# EAGLE board 05A-010 (EAGLE 9.6.2)
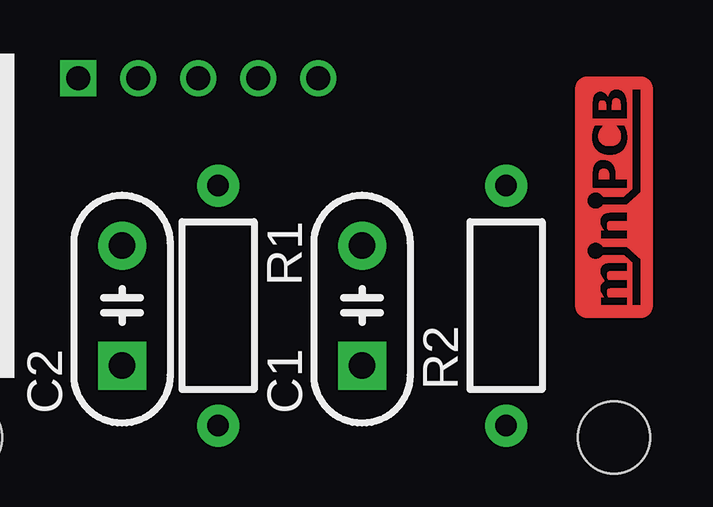
[diagram p0: board, top side]
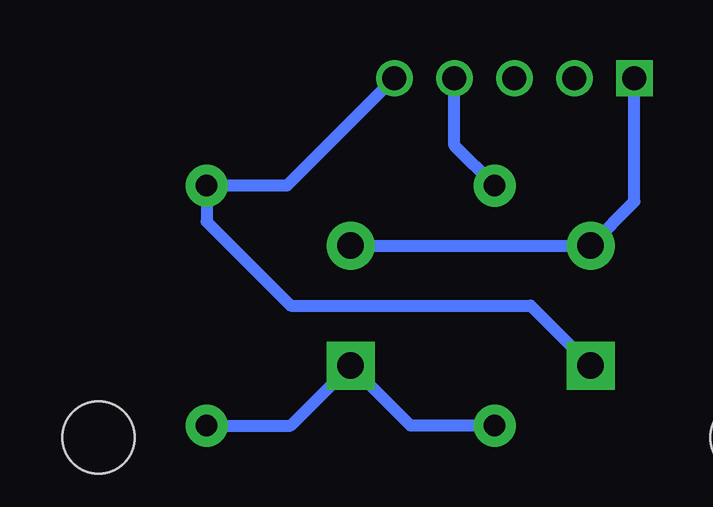
[diagram p1: board, bottom side, seen from below]

No outline drawn. Coordinates in mm, seen from the top.
Copper layers (1*16): Top 0.035mm / dielectric 1.5mm / Bottom 0.035mm
Design rules "default": minimum track width 6mil, minimum drill 0.35mm, track to track 6mil, track to pad 6mil, pad to pad 6mil, via to via 6mil, smd to smd 6mil, copper to edge 40mil, drill to drill 6mil, minimum pad ring 10mil, minimum via ring 8mil, stop-mask expansion 4mil, vias tented up to drill 0mil, thermal gap 10mil

## Footprints (pad centres in the part's own frame; a part is rotated, then mirrored left to right if it is on the bottom)
C050-024X044 = drill 1.1 pad 2 square: 1 -2.5,0 | drill 1.1 pad 2: 2 2.5,0
PINS_1X5 = drill 1 square: 1 0,0 | drill 1: 2 2.5,0; 3 5,0; 4 7.5,0; 5 10,0
MINIPCB_00A_20X33 = hole 3: 30,3; 3,3
0204/10 = drill 0.9 pad 1.75: 1 -5,0; 2 5,0

## Placement (x,y rotation side)
C1  [C050-024X044]  19.5,8.5 90 top
C2  [C050-024X044]  9.5,8.5 90 top
P1  [PINS_1X5]  7.67,17.98 0 top
PCB1  [MINIPCB_00A_20X33]  0,0 0 top
R1  [0204/10]  13.5,8.5 270 top
R2  [0204/10]  25.5,8.5 90 top

## Library data of the parts
C1 C2 P1 R1 R2 = minipcb
PCB1 = minipcb; CIRCUIT_CATEGORY: CIRCUIT CATEGORY; REVISION: A1; TITLE: TITLE

## Nets
GND: C1.2 C2.2 P1.1
INPUT: P1.4 R1.1
N$2: C1.1 R1.2 R2.1
OUTPUT: C2.1 P1.5 R2.2

## Tracks (layer width: path | path; a pad name or v marks a point on that pad's centre or on a via)
GND
  Bottom 0.5: C1.2 C2.2 7.67,12.83 P1.1
INPUT
  Bottom 0.5: R1.1 15.17,15.17 P1.4
N$2
  Bottom 0.5: R2.1 22,3.5 C1.1 17,3.5 R1.2
OUTPUT
  Bottom 0.5: P1.5 22.15,13.5 R2.2 25.5,12 22,8.5 12,8.5 C2.1